# EAGLE board DemoBoard (EAGLE 9.6.2)
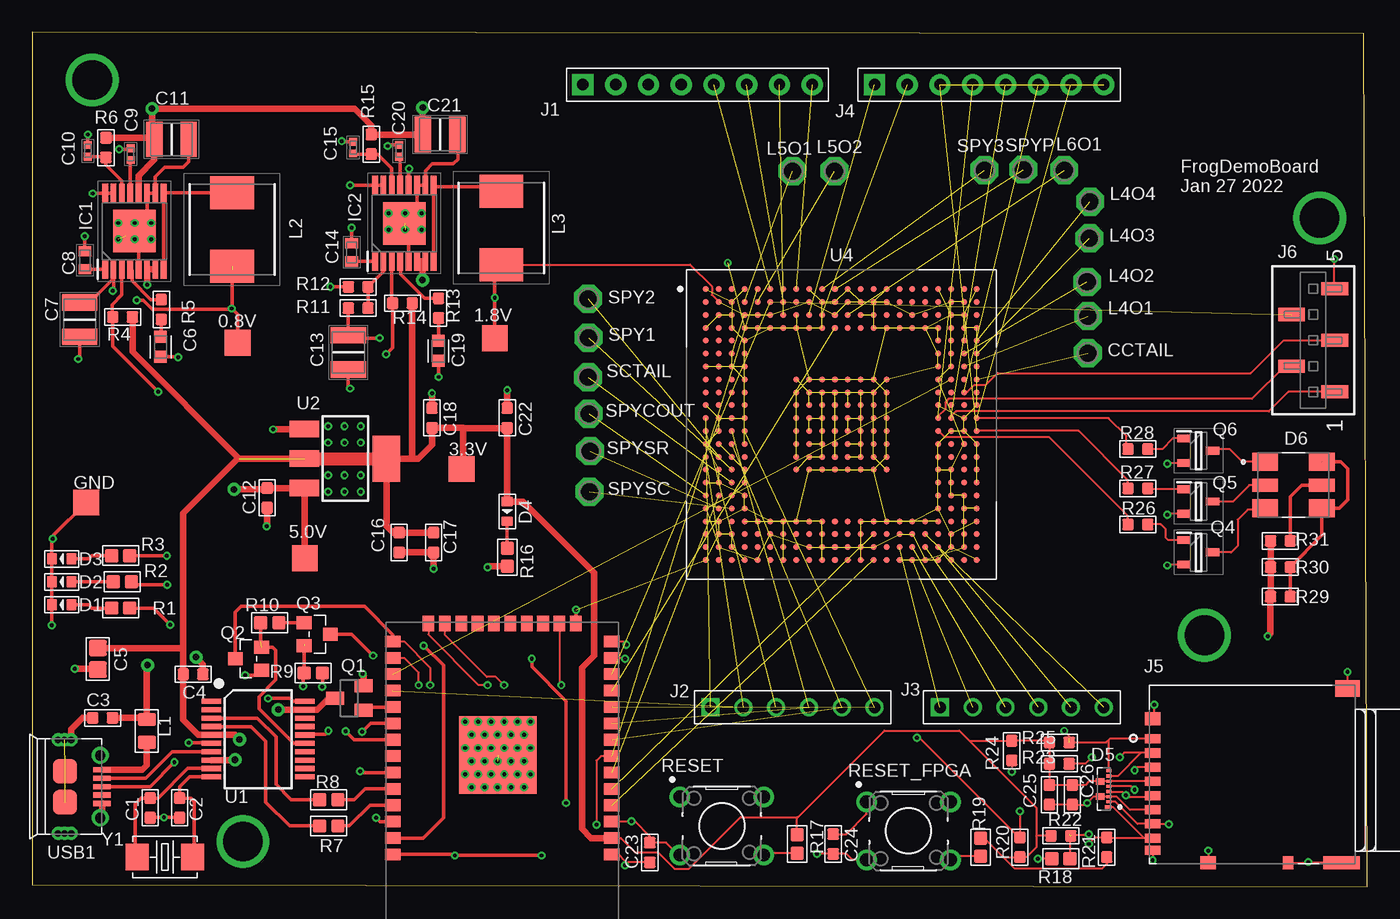
[diagram p0: board, top side]
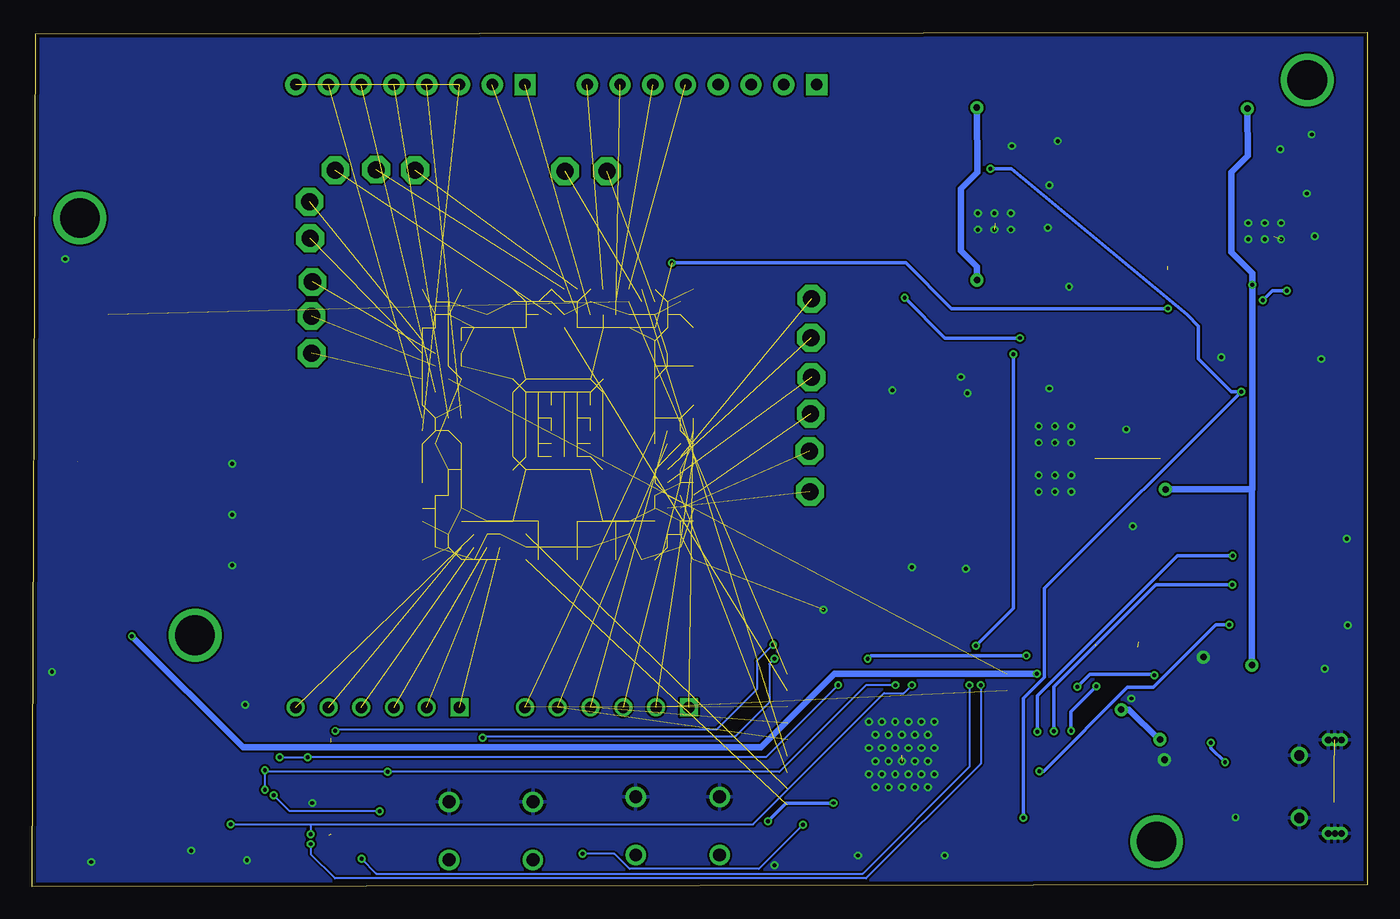
[diagram p1: board, bottom side, seen from below]

Size 103.51 x 66.22 mm. Coordinates in mm from the lower left corner, seen from the top.
Outline: 0,0.13 103.51,0 103.26,66.09 0,66.22 0,0.13
Copper layers (1*16): Top 0.035mm / dielectric 1.5mm / Bottom 0.035mm
Design rules "default *": minimum track width 6mil, minimum drill 12mil, track to track 6mil, track to pad 6mil, pad to pad 6mil, via to via 6mil, smd to smd 0mil, copper to edge 12mil, drill to drill 12mil, minimum pad ring 10mil, minimum via ring 6mil, stop-mask expansion 2mil, vias tented up to drill 0mil, thermal gap 10mil

## Footprints (pad centres in the part's own frame; a part is rotated, then mirrored left to right if it is on the bottom)
TP20SQ = smd 2 x 2: TP 0,0
C0603 = smd 0.889 x 0.889: 1 0,0.762; 2 0,-0.762
C0805 = smd 1.397 x 1.27: 1 0,0.835; 2 0,-0.835
CAPC1608X85 = smd 0.921 x 0.97: 1 -0.775,0; 2 0.775,0
CAPC3225X270N = smd 1.26 x 2.72: 1 -1.33,0; 2 1.33,0
CAPC1608X97N = smd 0.78 x 0.98: 1 -0.7,0; 2 0.7,0
CAPC1005X55N = smd 0.6 x 0.62: 1 -0.46,0; 2 0.46,0
P1-13 = drill 1.321 pad 2.159 octagon: TP 0,0
LED-0603 = smd 0.762 x 0.889: + -0.762,0; - 0.762,0
TVS_ESD7016MUTAG = smd 0.5 x 0.25: 1 -0.35,1.4 | smd 0.4 x 0.25: 2 -0.4,1; 3 -0.4,0.6; 4 -0.4,0.2; 5 -0.4,-0.2; 6 -0.4,-0.6; 7 -0.4,-1; 8 -0.4,-1.4 | smd 0.65 x 0.5: 9 0.275,-0.58; 10 0.275,0.58
LED_IN-P55TATRGB = smd 2 x 1.4: 1 -2.2,1.8; 3 -2.2,-1.8; 4 2.2,-1.8; 6 2.2,1.8 | smd 2 x 1: 2 -2.2,0; 5 2.2,0
SOP65P640X120-17N = smd 1.475 x 0.45: 1 -2.938,2.275; 2 -2.938,1.625; 3 -2.938,0.975; 4 -2.938,0.325; 5 -2.938,-0.325; 6 -2.938,-0.975; 7 -2.938,-1.625; 8 -2.938,-2.275; 9 2.938,-2.275; 10 2.938,-1.625; 11 2.938,-0.975; 12 2.938,-0.325; 13 2.938,0.325; 14 2.938,0.975; 15 2.938,1.625; 16 2.938,2.275 | smd 3.3 x 3.3: 17 0,0
8P-2.54 = drill 0.889 pad 1.651 square: 1 0,8.89 | drill 0.889 pad 1.651: 2 0,6.35; 3 0,3.81; 4 0,1.27; 5 0,-1.27; 6 0,-3.81; 7 0,-6.35; 8 0,-8.89
6P-2.54-55/35MIL = drill 0.889 pad 1.397 square: 1 0,6.35 | drill 0.889 pad 1.397: 2 0,3.81; 3 0,1.27; 4 0,-1.27; 5 0,-3.81; 6 0,-6.35
HRS_DM3AT-SF-PEJM5 = smd 0.7 x 1.2: 1 3.2,0; 2 2.1,0; 3 1,0; 4 -0.1,0; 5 -1.2,0; 6 -2.3,0; 7 -3.4,0; 8 -4.5,0; SWB -5.45,0 | smd 1 x 1.2: P1 -6.4,-4.3; P4 4.75,0 | smd 1 x 2.8: P2 -6.4,-14.65 | smd 1.3 x 1.9: P3 7.1,-15.1 | smd 1 x 0.8: SWA -6.4,-10.5
SAMTEC-MMS-105-02-X-SV = smd 1.016 x 2.085: 1 -4,-1.677; 2 -2,1.677; 3 0,-1.677; 4 2,1.677; 5 4,-1.677
L0805 = smd 1.016 x 1.397: 1 -0.889,0; 2 0.889,0
INDPM7066X300N = smd 2.55 x 3.4: 1 -2.85,0; 2 2.85,0
SOT23 = smd 1 x 1.4: 1 -0.95,-1.1; 2 0.95,-1.1; 3 0,1.1
SOT-23 = smd 1.016 x 1.143: 1 -0.889,-1.016; 2 0.889,-1.016; 3 0,1.016
SOT95P230X110-3N = smd 1.05 x 0.6: 1 -1.1,0.95; 2 -1.1,-0.95; 3 1.1,0
R0603 = smd 1.016 x 1.016: 1 0,0.708; 2 0,-0.708
R0603' = smd 0.889 x 0.889: 1 0,0.762; 2 0,-0.762
SW_B3F-1000 = drill 1 pad 1.6: 1 -3.25,2.25; 2 3.25,2.25; 3 -3.25,-2.25; 4 3.25,-2.25
SSOP20-0.65-7.6X5.2MM = smd 0.4 x 1.5: 1 -2.925,-3.625; 2 -2.275,-3.625; 3 -1.625,-3.625; 4 -0.975,-3.625; 5 -0.325,-3.625; 6 0.325,-3.625; 7 0.975,-3.625; 8 1.625,-3.625; 9 2.275,-3.625; 10 2.925,-3.625; 11 2.925,3.625; 12 2.275,3.625; 13 1.625,3.625; 14 0.975,3.625; 15 0.325,3.625; 16 -0.325,3.625; 17 -0.975,3.625; 18 -1.625,3.625; 19 -2.275,3.625; 20 -2.925,3.625
SOT-223 = smd 1.27 x 2.286: 1 -2.286,-3.175; 2 0,-3.175; 3 2.286,-3.175 | smd 3.556 x 2.159: TER 0,3.175
WROOM32_SKINNY = smd 1.2 x 0.9: 1 -8.5,5; 2 -8.5,3.73; 3 -8.5,2.46; 4 -8.5,1.19; 5 -8.5,-0.08; 6 -8.5,-1.35; 7 -8.5,-2.62; 8 -8.5,-3.89; 9 -8.5,-5.16; 10 -8.5,-6.43; 11 -8.5,-7.7; 12 -8.5,-8.97; 13 -8.5,-10.24; 14 -8.5,-11.51; 25 8.5,-11.51; 26 8.5,-10.24; 27 8.5,-8.97; 28 8.5,-7.7; 29 8.5,-6.43; 30 8.5,-5.16; 31 8.5,-3.89; 32 8.5,-2.62; 33 8.5,-1.35; 34 8.5,-0.08; 35 8.5,1.19; 36 8.5,2.46; 37 8.5,3.73; 38 8.5,5 | smd 0.9 x 1.2: 15 -5.7,-12.9; 16 -4.43,-12.9; 17 -3.16,-12.9; 18 -1.89,-12.9; 19 -0.62,-12.9; 20 0.65,-12.9; 21 1.92,-12.9; 22 3.19,-12.9; 23 4.46,-12.9; 24 5.73,-12.9 | smd 6 x 6: P$1 0.34,-2.7
BGA484C100P22X22_2400X2400X220N = smd 0.45 x 0.45: A1 -10.5,10.5; A2 -9.5,10.5; A3 -8.5,10.5; A4 -7.5,10.5; A5 -6.5,10.5; A6 -5.5,10.5; A7 -4.5,10.5; A8 -3.5,10.5; A9 -2.5,10.5; A10 -1.5,10.5; A11 -0.5,10.5; A12 0.5,10.5; A13 1.5,10.5; A14 2.5,10.5; A15 3.5,10.5; A16 4.5,10.5; A17 5.5,10.5; A18 6.5,10.5; A19 7.5,10.5; A20 8.5,10.5; A21 9.5,10.5; A22 10.5,10.5; AA1 -10.5,-9.5; AA2 -9.5,-9.5; AA3 -8.5,-9.5; AA4 -7.5,-9.5; AA5 -6.5,-9.5; AA6 -5.5,-9.5; AA7 -4.5,-9.5; AA8 -3.5,-9.5; AA9 -2.5,-9.5; AA10 -1.5,-9.5; AA11 -0.5,-9.5; AA12 0.5,-9.5; AA13 1.5,-9.5; AA14 2.5,-9.5; AA15 3.5,-9.5; AA16 4.5,-9.5; AA17 5.5,-9.5; AA18 6.5,-9.5; AA19 7.5,-9.5; AA20 8.5,-9.5; AA21 9.5,-9.5; AA22 10.5,-9.5; AB1 -10.5,-10.5; AB2 -9.5,-10.5; AB3 -8.5,-10.5; AB4 -7.5,-10.5; AB5 -6.5,-10.5; AB6 -5.5,-10.5; AB7 -4.5,-10.5; AB8 -3.5,-10.5; AB9 -2.5,-10.5; AB10 -1.5,-10.5; AB11 -0.5,-10.5; AB12 0.5,-10.5; AB13 1.5,-10.5; AB14 2.5,-10.5; AB15 3.5,-10.5; AB16 4.5,-10.5; AB17 5.5,-10.5; AB18 6.5,-10.5; AB19 7.5,-10.5; AB20 8.5,-10.5; AB21 9.5,-10.5; AB22 10.5,-10.5; B1 -10.5,9.5; B2 -9.5,9.5; B3 -8.5,9.5; B4 -7.5,9.5; B5 -6.5,9.5; B6 -5.5,9.5; B7 -4.5,9.5; B8 -3.5,9.5; B9 -2.5,9.5; B10 -1.5,9.5; B11 -0.5,9.5; B12 0.5,9.5; B13 1.5,9.5; B14 2.5,9.5; B15 3.5,9.5; B16 4.5,9.5; B17 5.5,9.5; B18 6.5,9.5; B19 7.5,9.5; B20 8.5,9.5; B21 9.5,9.5; B22 10.5,9.5; C1 -10.5,8.5; C2 -9.5,8.5; C3 -8.5,8.5; C4 -7.5,8.5; C5 -6.5,8.5; C6 -5.5,8.5; C7 -4.5,8.5; C8 -3.5,8.5; C9 -2.5,8.5; C10 -1.5,8.5; C11 -0.5,8.5; C12 0.5,8.5; C13 1.5,8.5; C14 2.5,8.5; C15 3.5,8.5; C16 4.5,8.5; C17 5.5,8.5; C18 6.5,8.5; C19 7.5,8.5; C20 8.5,8.5; C21 9.5,8.5; C22 10.5,8.5; D1 -10.5,7.5; D2 -9.5,7.5; D3 -8.5,7.5; D4 -7.5,7.5; D5 -6.5,7.5; D6 -5.5,7.5; D7 -4.5,7.5; D8 -3.5,7.5; D9 -2.5,7.5; D10 -1.5,7.5; D11 -0.5,7.5; D12 0.5,7.5; D13 1.5,7.5; D14 2.5,7.5; D15 3.5,7.5; D16 4.5,7.5; D17 5.5,7.5; D18 6.5,7.5; D19 7.5,7.5; D20 8.5,7.5; D21 9.5,7.5; D22 10.5,7.5; E1 -10.5,6.5; E2 -9.5,6.5; E3 -8.5,6.5; E4 -7.5,6.5; E19 7.5,6.5; E20 8.5,6.5; E21 9.5,6.5; E22 10.5,6.5; F1 -10.5,5.5; F2 -9.5,5.5; F3 -8.5,5.5; F4 -7.5,5.5; F19 7.5,5.5; F20 8.5,5.5; F21 9.5,5.5; F22 10.5,5.5; G1 -10.5,4.5; G2 -9.5,4.5; G3 -8.5,4.5; G4 -7.5,4.5; G19 7.5,4.5; G20 8.5,4.5; G21 9.5,4.5; G22 10.5,4.5; H1 -10.5,3.5; H2 -9.5,3.5; H3 -8.5,3.5; H4 -7.5,3.5; H8 -3.5,3.5; H9 -2.5,3.5; H10 -1.5,3.5; H11 -0.5,3.5; H12 0.5,3.5; H13 1.5,3.5; H14 2.5,3.5; H15 3.5,3.5; H19 7.5,3.5; H20 8.5,3.5; H21 9.5,3.5; H22 10.5,3.5; J1 -10.5,2.5; J2 -9.5,2.5; J3 -8.5,2.5; J4 -7.5,2.5; J8 -3.5,2.5; J9 -2.5,2.5; J10 -1.5,2.5; J11 -0.5,2.5; J12 0.5,2.5; J13 1.5,2.5; J14 2.5,2.5; J15 3.5,2.5; J19 7.5,2.5; J20 8.5,2.5; J21 9.5,2.5; J22 10.5,2.5; K1 -10.5,1.5; K2 -9.5,1.5; K3 -8.5,1.5; K4 -7.5,1.5; K8 -3.5,1.5; K9 -2.5,1.5; K10 -1.5,1.5; K11 -0.5,1.5; K12 0.5,1.5; K13 1.5,1.5; K14 2.5,1.5; K15 3.5,1.5; K19 7.5,1.5; K20 8.5,1.5; K21 9.5,1.5; K22 10.5,1.5; L1 -10.5,0.5; L2 -9.5,0.5; L3 -8.5,0.5; L4 -7.5,0.5; L8 -3.5,0.5; L9 -2.5,0.5; L10 -1.5,0.5; L11 -0.5,0.5; L12 0.5,0.5; L13 1.5,0.5; L14 2.5,0.5; L15 3.5,0.5; L19 7.5,0.5; L20 8.5,0.5; L21 9.5,0.5; L22 10.5,0.5; M1 -10.5,-0.5; M2 -9.5,-0.5; M3 -8.5,-0.5; M4 -7.5,-0.5; M8 -3.5,-0.5; M9 -2.5,-0.5; M10 -1.5,-0.5; M11 -0.5,-0.5; M12 0.5,-0.5; M13 1.5,-0.5; M14 2.5,-0.5; M15 3.5,-0.5; M19 7.5,-0.5; M20 8.5,-0.5; M21 9.5,-0.5; M22 10.5,-0.5; N1 -10.5,-1.5; N2 -9.5,-1.5; N3 -8.5,-1.5; N4 -7.5,-1.5; N8 -3.5,-1.5; N9 -2.5,-1.5; N10 -1.5,-1.5; N11 -0.5,-1.5; N12 0.5,-1.5; N13 1.5,-1.5; N14 2.5,-1.5; N15 3.5,-1.5; N19 7.5,-1.5; N20 8.5,-1.5; N21 9.5,-1.5; N22 10.5,-1.5; P1 -10.5,-2.5; P2 -9.5,-2.5; P3 -8.5,-2.5; P4 -7.5,-2.5; P8 -3.5,-2.5; P9 -2.5,-2.5; P10 -1.5,-2.5; P11 -0.5,-2.5; P12 0.5,-2.5; P13 1.5,-2.5; P14 2.5,-2.5; P15 3.5,-2.5; P19 7.5,-2.5; P20 8.5,-2.5; P21 9.5,-2.5; P22 10.5,-2.5; R1 -10.5,-3.5; R2 -9.5,-3.5; R3 -8.5,-3.5; R4 -7.5,-3.5; R8 -3.5,-3.5; R9 -2.5,-3.5; R10 -1.5,-3.5; R11 -0.5,-3.5; R12 0.5,-3.5; R13 1.5,-3.5; R14 2.5,-3.5; R15 3.5,-3.5; R19 7.5,-3.5; R20 8.5,-3.5; R21 9.5,-3.5; R22 10.5,-3.5; T1 -10.5,-4.5; T2 -9.5,-4.5; T3 -8.5,-4.5; T4 -7.5,-4.5; T19 7.5,-4.5; T20 8.5,-4.5; T21 9.5,-4.5; T22 10.5,-4.5; U1 -10.5,-5.5; U2 -9.5,-5.5; U3 -8.5,-5.5; U4 -7.5,-5.5; U19 7.5,-5.5; U20 8.5,-5.5; U21 9.5,-5.5; U22 10.5,-5.5; V1 -10.5,-6.5; V2 -9.5,-6.5; V3 -8.5,-6.5; V4 -7.5,-6.5; V19 7.5,-6.5; V20 8.5,-6.5; V21 9.5,-6.5; V22 10.5,-6.5; W1 -10.5,-7.5; W2 -9.5,-7.5; W3 -8.5,-7.5; W4 -7.5,-7.5; W5 -6.5,-7.5; W6 -5.5,-7.5; W7 -4.5,-7.5; W8 -3.5,-7.5; W9 -2.5,-7.5; W10 -1.5,-7.5; W11 -0.5,-7.5; W12 0.5,-7.5; W13 1.5,-7.5; W14 2.5,-7.5; W15 3.5,-7.5; W16 4.5,-7.5; W17 5.5,-7.5; W18 6.5,-7.5; W19 7.5,-7.5; W20 8.5,-7.5; W21 9.5,-7.5; W22 10.5,-7.5; Y1 -10.5,-8.5; Y2 -9.5,-8.5; Y3 -8.5,-8.5; Y4 -7.5,-8.5; Y5 -6.5,-8.5; Y6 -5.5,-8.5; Y7 -4.5,-8.5; Y8 -3.5,-8.5; Y9 -2.5,-8.5; Y10 -1.5,-8.5; Y11 -0.5,-8.5; Y12 0.5,-8.5; Y13 1.5,-8.5; Y14 2.5,-8.5; Y15 3.5,-8.5; Y16 4.5,-8.5; Y17 5.5,-8.5; Y18 6.5,-8.5; Y19 7.5,-8.5; Y20 8.5,-8.5; Y21 9.5,-8.5; Y22 10.5,-8.5
MICRO-USB5+6P-SMD-0.65-AB = smd 0.4 x 1.35: 1 -1.3,2.875; 2 -0.65,2.875; 3 0,2.875; 4 0.65,2.875; 5 1.3,2.875 | smd 1.9 x 1.9: P1 -1.2,0; P2 1.2,0 | drill 0.508 pad 1.016: P3_1 -3.625,-0.533; P3_2 -3.625,-0.025; P3_3 -3.625,0.483; P4_1 3.625,-0.533; P4_2 3.625,-0.025; P4_3 3.625,0.483 | drill 0.8: P5 -2.425,2.73; P6 2.425,2.73
X2-SMD-5.0X3.2X1.3MM = smd 1.778 x 2.032: 1 -2.159,0; 2 2.159,0

## Placement (x,y rotation side)
0.8V  TPTP20SQ  [TP20SQ]  15.93,42.16 0 top
1.8V  TPTP20SQ  [TP20SQ]  35.86,42.49 0 top
3.3V  TPTP20SQ  [TP20SQ]  33.3,32.36 0 top
5.0V  TPTP20SQ  [TP20SQ]  21.13,25.45 0 top
C1  22pf  [C0603]  9.14,6.1 180 top
C2  22pf  [C0603]  11.43,6.1 180 top
C3  10uf  [C0603]  5.46,13.08 90 top
C4  100nf  [C0603]  12.47,16.46 270 top
C5  22uf  [C0805]  5.08,17.65 0 top
C6  3.3nF  [CAPC1608X85]  9.96,41.83 270 top
C7  100uF  [CAPC3225X270N]  3.68,43.94 270 top
C8  33nF  [CAPC1608X97N]  4.09,48.54 90 top
C9  1uF  [CAPC1005X55N]  7.62,56.77 90 top
C10  100nF  [CAPC1005X55N]  4.32,57.02 90 top
C11  100uF  [CAPC3225X270N]  10.79,57.91 0 top
C12  10uf  [C0603]  18.21,30.12 180 top
C13  100uF  [CAPC3225X270N]  24.51,41.4 270 top
C14  33nF  [CAPC1608X97N]  24.77,49.15 90 top
C15  100nF  [CAPC1005X55N]  24.89,57.28 90 top
C16  10uf  [C0603]  28.45,26.67 180 top
C17  10uf  [C0603]  31.11,26.67 180 top
C18  1uf  [C0603]  30.99,36.32 0 top
C19  3.3nF  [CAPC1608X85]  31.5,41.53 270 top
C20  1uF  [CAPC1005X55N]  28.45,57.02 90 top
C21  100uF  [CAPC3225X270N]  31.62,58.29 0 top
C22  10uf  [C0603]  36.83,36.32 0 top
C23  1uf  [C0603]  47.88,2.64 180 top
C24  1uf  [C0603]  62.1,3.3 0 top
C25  1uf  [C0603]  78.87,7.11 180 top
C26  1uf  [C0603]  80.64,7.11 180 top
CCTAIL  TPPAD1-13  [P1-13]  81.84,41.35 0 top
D1  RED-0603  [LED-0603]  2.29,21.84 180 top
D2  GREEN-0603  [LED-0603]  2.29,23.62 180 top
D3  BLUE-0603  [LED-0603]  2.29,25.4 180 top
D4  YELLOW-0603  [LED-0603]  36.83,29.08 270 top
D5  ESD7016MUTAG  [TVS_ESD7016MUTAG]  83.08,7.57 180 top
D6  IN-P55TATRGB  [LED_IN-P55TATRGB]  97.79,31.11 0 top
GND  TPTP20SQ  [TP20SQ]  4.19,29.77 0 top
IC1  LM20125MHE_NOPB  [SOP65P640X120-17N]  7.92,50.8 90 top
IC2  LM20125MHE_NOPB  [SOP65P640X120-17N]  28.85,51.41 90 top
J1  [8P-2.54]  51.59,62.15 90 top
J2  [6P-2.54-55/35MIL]  58.95,13.89 90 top
J3  [6P-2.54-55/35MIL]  76.73,13.89 90 top
J4  [8P-2.54]  74.19,62.15 90 top
J5  DM3AT-SF-PEJM5  [HRS_DM3AT-SF-PEJM5]  86.87,8.26 90 top
J6  SAMTEC-MMS-105-02-X-SVJ  [SAMTEC-MMS-105-02-X-SV]  99.31,42.34 90 top
L1  330R-1500MA  [L0805]  8.89,12.07 90 top
L2  1.5uH  [INDPM7066X300N]  15.49,50.93 90 top
L3  1.5uH  [INDPM7066X300N]  36.37,51.05 90 top
L4O1  TPPAD1-13  [P1-13]  81.86,44.22 0 top
L4O2  TPPAD1-13  [P1-13]  81.79,46.86 0 top
L4O3  TPPAD1-13  [P1-13]  81.97,50.24 0 top
L4O4  TPPAD1-13  [P1-13]  82.02,53.09 0 top
L5O1  TPPAD1-13  [P1-13]  58.95,55.45 0 top
L5O2  TPPAD1-13  [P1-13]  62.2,55.45 0 top
L6O1  TPPAD1-13  [P1-13]  80.01,55.52 0 top
Q1  IRLML0030TRPBF  [SOT23]  24.59,14.61 90 top
Q2  MMBT3904,215  [SOT-23]  16.76,17.65 90 top
Q3  MMBT3904,215  [SOT-23]  22.1,19.56 270 top
Q4  BC846B,235  [SOT95P230X110-3N]  90.42,25.91 0 top
Q5  BC846B,235  [SOT95P230X110-3N]  90.42,29.84 0 top
Q6  BC846B,235  [SOT95P230X110-3N]  90.42,33.78 0 top
R1  220R  [R0603]  6.86,21.59 90 top
R2  100R  [R0603]  6.99,23.62 90 top
R3  100R  [R0603]  6.86,25.65 90 top
R4  10k  [R0603']  7.01,44.15 270 top
R5  3.16k  [R0603']  10.01,44.73 0 top
R6  1  [R0603']  5.71,57.28 0 top
R7  220R  [R0603]  22.99,4.7 90 top
R8  220R  [R0603]  22.99,6.73 270 top
R9  10K  [R0603]  21.79,16.56 90 top
R10  10K  [R0603]  18.41,20.45 90 top
R11  12.7k  [R0603']  25.27,44.83 90 top
R12  10.2k  [R0603']  25.27,46.48 270 top
R13  3.16k  [R0603']  31.5,44.83 0 top
R14  10k  [R0603']  28.7,45.21 270 top
R15  1  [R0603']  26.29,57.53 0 top
R16  220R  [R0603]  36.83,25.53 180 top
R17  10K  [R0603]  59.31,3.3 180 top
R18  0R  [R0603]  79.76,2.16 90 top
R19  10K  [R0603]  73.53,3.05 180 top
R20  51K  [R0603']  76.58,3.05 0 top
R21  51K  [R0603']  83.31,3.05 0 top
R22  51K  [R0603']  79.76,3.94 270 top
R23  51K  [R0603']  79.63,9.53 270 top
R24  4.7K  [R0603']  75.95,10.54 180 top
R25  51K  [R0603']  79.63,11.18 270 top
R26  16k  [R0603']  85.72,28.07 90 top
R27  16k  [R0603']  85.72,30.86 90 top
R28  16k  [R0603']  85.72,33.91 270 top
R29  5.1  [R0603']  96.77,22.48 90 top
R30  5.1  [R0603']  96.77,24.77 90 top
R31  68  [R0603']  96.77,26.8 90 top
RESET  B3F-1000  [SW_B3F-1000]  53.47,4.7 0 top
RESET_FPGA  B3F-1000  [SW_B3F-1000]  67.94,4.32 0 top
SCTAIL  TPPAD1-13  [P1-13]  43.1,39.47 0 top
SPY1  TPPAD1-13  [P1-13]  43.13,42.55 0 top
SPY2  TPPAD1-13  [P1-13]  43.1,45.57 0 top
SPY3  TPPAD1-13  [P1-13]  73.84,55.52 0 top
SPYCOUT  TPPAD1-13  [P1-13]  43.15,36.65 0 top
SPYP  TPPAD1-13  [P1-13]  76.83,55.58 0 top
SPYSC  TPPAD1-13  [P1-13]  43.21,30.61 0 top
SPYSR  TPPAD1-13  [P1-13]  43.26,33.76 0 top
U1  CH340T-SSOP20  [SSOP20-0.65-7.6X5.2MM]  17.53,11.43 270 top
U2  PMIC-CJT1117-3.3(SOT223)  [SOT-223]  24.28,33.17 270 top
U3  ESP32_WROOM32_SKINNY  [WROOM32_SKINNY]  36.45,7.49 180 top
U4  FROG12NM  [BGA484C100P22X22_2400X2400X220N]  62.74,35.81 0 top
USB1  ZX62-B-5PA  [MICRO-USB5+6P-SMD-0.65-AB]  2.54,7.75 270 top
Y1  12MHZ - 445I33E12M00000  [X2-SMD-5.0X3.2X1.3MM]  10.29,2.29 180 top

## Library data of the parts
0.8V 1.8V 3.3V 5.0V CCTAIL GND L4O1-L4O4 L5O1 L5O2 L6O1 SCTAIL SPY1-SPY3 SPYCOUT SPYP SPYSC SPYSR = testpad
C1 C2 = Seeed-Capacitor; MPN: CC0603JRNPO9BN220
C3 C12 C16 C17 C22 = Seeed-Capacitor; MPN: CC0603KRX5R6BB106
C4 = Seeed-Capacitor; MPN: CC0603KRX7R9BB104
C5 = Seeed-Capacitor; MPN: CC0805MKX5R5BB226
C6 C19 = Capacitor; CATEGORY: Capacitor
C7 C11 C13 C21 = GRM32ER60J107ME20L; DESCRIPTION: 1210 X5R ceramic cap,100uF 6.3V Murata 1210 GRM 100uF Ceramic Multilayer Capacitor, 6.3 V dc, +85C, X5R Dielectric, +/-20% SMD; HEIGHT: 2.7mm; MANUFACTURER_NAME: Murata Electronics; MANUFACTURER_PART_NUMBER: GRM32ER60J107ME20L; MOUSER_PART_NUMBER: 81-GRM32ER60J107ME20; MOUSER_PRICE-STOCK: https://www.mouser.co.uk/ProductDetail/Murata-Electronics/GRM32ER60J107ME20L?qs=35X%252B5ekJ2E6CDZFQeV9O8Q%3D%3D
C8 C14 = VJ0603Y333KXXAC; DESCRIPTION: Vishay VJ0603Y333KXXAC 33nF MLCC 25V dc +/-10% Tolerance SMD; HEIGHT: 0.97mm; MANUFACTURER_NAME: Vishay; MANUFACTURER_PART_NUMBER: VJ0603Y333KXXAC; MOUSER_PART_NUMBER: 77-VJ0603Y333KXXAC; MOUSER_PRICE-STOCK: https://www.mouser.co.uk/ProductDetail/Vishay-Vitramon/VJ0603Y333KXXAC?qs=oNxrVNw6PNVD7uvknxabUQ%3D%3D
C9 C20 = GRM155R61E105KA12D; DESCRIPTION: MURATA - GRM155R61E105KA12D - CAP, MLCC, X5R, 1UF, 25V, 0402; HEIGHT: 0.55mm; MANUFACTURER_NAME: Murata Electronics; MANUFACTURER_PART_NUMBER: GRM155R61E105KA12D; MOUSER_PART_NUMBER: 81-GRM155R61E105KA2D; MOUSER_PRICE-STOCK: https://www.mouser.co.uk/ProductDetail/Murata-Electronics/GRM155R61E105KA12D?qs=hiffU4J9V6bE4a81t2Mv5A%3D%3D
C10 C15 = GCM155R71C104KA55D; DESCRIPTION: Capacitor GCM15 L=1.0mm W=0.5mm T=0.5mm; HEIGHT: 0.55mm; MANUFACTURER_NAME: Murata Electronics; MANUFACTURER_PART_NUMBER: GCM155R71C104KA55D; MOUSER_PART_NUMBER: 81-GCM155R71C104KA5D; MOUSER_PRICE-STOCK: https://www.mouser.co.uk/ProductDetail/Murata-Electronics/GCM155R71C104KA55D?qs=aEuGZpxfbxVTPYRtXT4ecg%3D%3D
C18 C23-C26 = Seeed-Capacitor; MPN: CC0603KRX7R8BB105
D1 = Seeed-LED; MPN: 19-217-R6C-AL1M2VY-3T
D2 = Seeed-LED; MPN: 19-217-G7C-AN1P2-3T
D3 = Seeed-LED; MPN: 19-217-BHC-ZL1M2RY-3T
D4 = Seeed-LED; MPN: 19-217-Y5C-AM1N1VY-3T
D5 = ESD7016MUTAG; AVAILABILITY: In Stock; DESCRIPTION: 10V Clamp 1A (8/20µs) Ipp Tvs Diode Surface Mount 8-UDFN (3.3x1.0); MF: ON Semiconductor; MP: ESD7016MUTAG; PACKAGE: UDFN-8 ON Semiconductor; PRICE: None; PURCHASE-URL: https://pricing.snapeda.com/search/part/ESD7016MUTAG/?ref=eda
D6 = IN-P55TATRGB; AVAILABILITY: Warning; DESCRIPTION: Red, Green, Blue (RGB) 624nm Red, 520nm Green, 468nm Blue LED Indication - Discrete 2V Red, 3.2V Green, 3.2V Blue 6-SMD, J-Lead; MF: Inolux; MOUSER-PURCHASE-URL: https://snapeda.com/shop?store=Mouser&id=3600412; MP: IN-P55TATRGB; PACKAGE: SMD-6 Inolux; PRICE: None
IC1 IC2 = LM20125MHE_NOPB; DESCRIPTION: 2.95-5.5V, 5A, Current Mode Synchronous Buck Regulator with Optional Automotive Grade; HEIGHT: 1.2mm; MANUFACTURER_NAME: Texas Instruments; MANUFACTURER_PART_NUMBER: LM20125MHE/NOPB; MOUSER_PART_NUMBER: 926-LM20125MHE/NOPB; MOUSER_PRICE-STOCK: https://www.mouser.co.uk/ProductDetail/Texas-Instruments/LM20125MHE-NOPB?qs=X1J7HmVL2ZErox0lMoKn2A%3D%3D
J1-J4 = connector
J5 = DM3AT-SF-PEJM5; AVAILABILITY: Good; DESCRIPTION: Memory Card Connectors R/A SMT MICROSD CON PUSH-PUSH TOP BRDMNT; MF: Hirose Connector; MP: DM3AT-SF-PEJM5; PACKAGE: None; PRICE: None; PURCHASE-URL: https://pricing.snapeda.com/search/part/DM3AT-SF-PEJM5/?ref=eda
J6 = connector5pin; AVAILABILITY: Bad; DESCRIPTION: 5 Position Receptacle Connector Surface Mount; MF: Samtec; MP: MMS-105-02-L-SV-K; PACKAGE: None; PRICE: None
L1 = Seeed-Inductor; MPN: BLM21PG331SN1D
L2 L3 = FDSD0630-H-1R0MB=P3; DESCRIPTION: Fixed Inductors 2726 30VDC 1uH 20% 13400mA; HEIGHT: 3mm; MANUFACTURER_NAME: Murata Electronics; MANUFACTURER_PART_NUMBER: FDSD0630-H-1R0MB=P3; MOUSER_PART_NUMBER: 81-FDSD0630H1R0MB=P3; MOUSER_PRICE-STOCK: https://www.mouser.co.uk/ProductDetail/Murata-Electronics/FDSD0630-H-1R0MB%3dP3?qs=OlC7AqGiEDkXEYHel%252BUfZw%3D%3D
Q1 = IRLML0030TRPBF
Q2 Q3 = Seeed-Transistor; MPN: MMBT3904LT1G
Q4-Q6 = BC846B_235; DESCRIPTION: BC846 series - 65 V, 100 mA NPN general-purpose transistors; HEIGHT: 1.1mm; MANUFACTURER_NAME: Nexperia; MANUFACTURER_PART_NUMBER: BC846B,235; MOUSER_PART_NUMBER: 771-BC846B235; MOUSER_PRICE-STOCK: https://www.mouser.co.uk/ProductDetail/Nexperia/BC846B235?qs=me8TqzrmIYV6j%2F8Z1FkTHw%3D%3D
R1 R7 R8 R16 = Seeed-Resistor; MPN: RC0603JR-07220RL
R2 = Seeed-Resistor; MPN: RC0603JR-0710RL
R3 = Seeed-Resistor; MPN: RC0603JR-07100RL
R4-R6 R11-R15 R24 R26-R31 = Seeed-Resistor-2016; MPN: RC0603JR-074K7L
R9 R10 R17 R19 = Seeed-Resistor; MPN: RC0603FR-0710KL
R18 = Seeed-Resistor; MPN: RC0603JR-070RL
R20-R23 R25 = Seeed-Resistor-2016; MPN: RC0603JR-0751KL
RESET RESET_FPGA = B3F-1000; AVAILABILITY: Good; DESCRIPTION: Tactile Switch SPST-NO Top Actuated Through Hole; MF: Omron; MP: B3F-1000; PACKAGE: None; PRICE: None; PURCHASE-URL: https://pricing.snapeda.com/search/part/B3F-1000/?ref=eda
U1 = Seeed-IC; MPN: CH340T
U2 = Seeed-IC; MPN: LD1117S33CTR
U3 = microbuilder
U4 = BGASolder
USB1 = Seeed-Connector; MPN: ZX62-B-5PA
Y1 = Seeed-Crystal Oscillator; MPN: 5032/2P

## Nets
0.8V: 0.8V.TP C7.1 IC1.2 L2.1 U4.C8 U4.D4 U4.D5 U4.D7 U4.D8 U4.D15 U4.D16 U4.D19 U4.E19 U4.H9 U4.H10 U4.H11 U4.H12 U4.H13 U4.H14 U4.J8 U4.J15 U4.K8 U4.K15 U4.L8 U4.L15 U4.M8 U4.M15 U4.N8 U4.N15 U4.P8 U4.P15 U4.R9 U4.R10 U4.R11 U4.R12 U4.R13 U4.R14 U4.W4 U4.W5 U4.W8 U4.W15 U4.W18 U4.W19
1.8V: 1.8V.TP C13.1 L3.1 R11.1 U4.AA2 U4.AA9 U4.AA14 U4.AA21 U4.AB5 U4.AB18 U4.B2 U4.B9 U4.B12 U4.B15 U4.B20 U4.B21 U4.C4 U4.C6 U4.C11 U4.C17 U4.D20 U4.E20 U4.F3 U4.F20 U4.G3 U4.G20 U4.H4 U4.H19 U4.N2 U4.N21 U4.R4 U4.R19 U4.R20 U4.T4 U4.U3 U4.U20 U4.U21 U4.V1 U4.V21 U4.V22 U4.Y6 U4.Y16 U4.Y17
3.3V: 3.3V.TP C4.2 C5.1 C16.2 C17.2 C18.2 C22.2 C25.2 C26.2 D4.+ D5.6 D5.9 J5.4 Q1.3 R4.1 R14.1 R17.2 R19.2 R20.2 R21.2 R22.2 R23.2 R24.2 R25.2 U1.5 U1.19 U2.2 U2.TER U3.2
3.3VSW: Q1.2 R29.1 R30.1 R31.1
3V3_EN: Q1.1 U3.29
5.0V: 5.0V.TP C3.2 C11.1 C12.2 C21.1 IC1.6 IC1.7 IC1.12 IC2.6 IC2.7 L1.2 R6.1 R15.1 U2.3
CCFF_HEAD: U3.6 U4.U2
CLK: J6.4 U3.12 U4.B6
DTR: Q2.2 R10.1 U1.15
GND: C1.1 C2.1 C3.1 C4.1 C5.2 C6.2 C7.2 C8.2 C9.2 C10.2 C11.2 C12.1 C13.2 C14.2 C15.2 C16.1 C17.1 C18.1 C19.2 C20.2 C21.2 C22.1 C23.1 C24.1 C25.1 C26.1 D1.- D2.- D3.- D5.3 D5.10 GND.TP IC1.5 IC1.10 IC1.11 IC1.15 IC1.16 IC1.17 IC2.5 IC2.10 IC2.11 IC2.15 IC2.16 IC2.17 J5.6 J5.P1 J5.P2 J5.P3 J5.P4 J5.SWA J5.SWB J6.5 Q4.2 Q5.2 Q6.2 R12.2 R16.1 RESET.1 RESET.2 RESET_FPGA.1 RESET_FPGA.2 U1.8 U1.20 U2.1 U3.1 U3.15 U3.38 U3.P$1 U4.A1 U4.A4 U4.A9 U4.A12 U4.A15 U4.A19 U4.A22 U4.AA3 U4.AA10 U4.AA13 U4.AA20 U4.AB1 U4.AB4 U4.AB7 U4.AB10 U4.AB13 U4.AB16 U4.AB19 U4.AB22 U4.B3 U4.B10 U4.B11 U4.B13 U4.B14 U4.C2 U4.C3 U4.C13 U4.C14 U4.C20 U4.C21 U4.D1 U4.D3 U4.D6 U4.D9 U4.D10 U4.D14 U4.D17 U4.D18 U4.D21 U4.D22 U4.E4 U4.F4 U4.F19 U4.G1 U4.G4 U4.G19 U4.G22 U4.H8 U4.H15 U4.J4 U4.J9 U4.J10 U4.J11 U4.J12 U4.J13 U4.J14 U4.K1 U4.K4 U4.K9 U4.K10 U4.K11 U4.K12 U4.K13 U4.K14 U4.K19 U4.K22 U4.L2 U4.L4 U4.L9 U4.L10 U4.L11 U4.L12 U4.L13 U4.L14 U4.L21 U4.M2 U4.M9 U4.M10 U4.M11 U4.M12 U4.M13 U4.M14 U4.M20 U4.M21 U4.N1 U4.N4 U4.N9 U4.N10 U4.N11 U4.N12 U4.N13 U4.N14 U4.N19 U4.N22 U4.P9 U4.P10 U4.P11 U4.P12 U4.P13 U4.P14 U4.R2 U4.R8 U4.R15 U4.T1 U4.T2 U4.T19 U4.T22 U4.U4 U4.U19 U4.V4 U4.V19 U4.W1 U4.W2 U4.W6 U4.W7 U4.W10 U4.W13 U4.W16 U4.W17 U4.W22 U4.Y2 U4.Y3 U4.Y10 U4.Y13 U4.Y20 USB1.5 USB1.P1 USB1.P2 USB1.P3_1 USB1.P3_2 USB1.P3_3 USB1.P4_1 USB1.P4_2 USB1.P4_3 USB1.P5 USB1.P6
GPIO0: J1.8 U4.A8
GPIO0_ESP: Q2.3 R18.1 U3.25
GPIO1: J4.2 U4.C10
GPIO2: J4.1 U4.C9
GPIO3: J1.5 U4.A6
GPIO4: J1.6 U4.B7
GPIO5: J1.7 U4.C7
GPIO6: J2.5 U3.8 U4.N3
GPIO7: J2.2 U3.28 U4.P1
GPIO8: J2.4 U3.9 U4.M3
GPIO9: J2.6 U3.10 U4.M4
GPIO10: J2.3 U4.M1
GPIO11: J2.1 U4.L1
GPIO12: J3.6 U4.Y18
GPIO13: J3.5 U4.AA19
GPIO14: J3.4 U4.AA18
GPIO15: J3.3 U4.AA17
GPIO16: J3.1 U4.AA16
GPIO17: J3.2 U4.AB17
GPIO18: R26.1 U4.M19
GPIO19: J4.3 J4.8 R27.1 U4.M22
GPIO20: J4.7 R28.2 U4.L22
GPIO21: J4.4 J6.2 U4.L19
GPIO22: J4.5 J6.1 U4.L20
GPIO23: J4.6 J6.3 U4.J21
N$1: D2.+ R2.1
N$2: R17.1 RESET.4
N$3: R19.1 RESET_FPGA.4
N$4: L4O4.TP U4.E22
N$5: L4O2.TP U4.F21
N$6: L4O3.TP U4.F22
N$7: D1.+ R1.1
N$8: L4O1.TP U4.G21
N$9: L5O1.TP U4.B4
N$10: L5O2.TP U4.B5
N$11: L6O1.TP U4.C12
N$12: Q3.1 R10.2
N$13: Q2.1 R9.2
N$14: IC1.4 R5.1
N$15: SPY2.TP U4.P2
N$16: SPY3.TP U4.A10
N$17: C6.1 R5.2
N$18: SPY1.TP U4.R3
N$19: SPYCOUT.TP U4.U1
N$20: C9.1 IC1.13
N$21: SPYSC.TP U4.V3
N$22: D3.+ R3.1
N$23: SPYSR.TP U4.V2
N$24: SPYP.TP U4.A11
N$25: D4.- R16.2
N$26: U1.7 USB1.2
N$27: U1.6 USB1.3
N$28: C1.2 U1.9 Y1.2
N$29: C2.2 U1.10 Y1.1
N$30: R8.2 U1.3
N$31: D6.1 Q6.3
N$32: Q5.1 R27.2
N$33: R7.2 U3.35
N$34: C8.1 IC1.1
N$35: IC1.8 IC1.9 L2.2
N$36: CCTAIL.TP U4.H22
N$37: C10.1 IC1.14 R6.2
N$38: IC2.4 R13.1
N$39: C19.1 R13.2
N$40: C20.1 IC2.13
N$41: C14.1 IC2.1
N$42: IC2.8 IC2.9 L3.2
N$43: C15.1 IC2.14 R15.2
N$44: D6.2 Q5.3
N$45: D6.3 Q4.3
N$47: Q6.1 R28.1
N$48: U3.17
N$49: Q4.1 R26.2
N$50: U3.18
N$51: U3.19
N$52: U3.20
N$53: U3.21
N$54: U3.22
N$55: J1.4
N$56: J1.3
N$57: D6.5 R31.2
N$58: J1.2
N$59: J1.1
N$61: SCTAIL.TP U4.T3
N$64: U1.14
N$65: U1.13
N$66: U1.12
N$67: U1.11
N$68: U1.18
N$69: U1.1
N$70: U1.2
P_RESET: U3.5 U4.Y14
PG_CORE: IC1.3 IC2.12 R4.2 U3.36
PG_IO: IC2.3 R14.2 U3.37
PROG_CLK: U3.4 U4.AB14
RESET: C23.2 Q3.3 RESET.3 U3.3
RESET_FPGA: C24.2 RESET_FPGA.3 U3.7 U4.A5
RTS: Q3.2 R9.1 U1.16
RXD0: R8.1 U3.34
SC_HEAD: U3.27 U4.H20
SD_CLK_IO14: D5.4 J5.5 R20.1 U3.13
SD_CMD_IO15: D5.5 J5.3 R24.1 U3.23
SD_CS_IO13: D5.7 J5.2 R23.1 U3.16
SD_D0_IO2: D5.2 J5.7 R18.2 R22.1 U3.24
SD_D1_IO4: D5.1 J5.8 R21.1 U3.26
SD_D2_IO12: D5.8 J5.1 R25.1 U3.14
STAT_LED1: R1.2 U3.33
STAT_LED2: R2.2 U3.31
STAT_LED3: R3.2 U3.30
TEST_EN: U3.11 U4.D11
TXD0: R7.1 U1.4
VBUS: L1.1 USB1.1
VCC2: D6.4 D6.6 R29.2 R30.2
VDD_CORE: IC2.2 R11.2 R12.1

## Tracks (layer width: path | path; a pad name or v marks a point on that pad's centre or on a via)
0.8V  (via drill 0.3)  (40 unrouted)
  Top 0.254: C7.1 4.42,45.27 6.31,47.16 IC1.2 6.3,46.23 v6.25,46.18 | v8.1,45.44 8.62,45.44 9.29,44.77 15.38,44.77 15.49,44.88 | 15.49,44.88 15.49,44.91 15.49,47.82 | 15.49,44.88 15.49,44.78 v15.47,44.81 15.93,44.35 0.8V.TP
  Bottom 0.254: v6.25,46.18 7.37,46.18 v8.1,45.44 | v15.47,44.81 32.23,44.81 35.76,48.34 v53.92,48.34
1.8V  (via drill 0.3)  (38 unrouted)
  Top 0.152: U4.B2 52.69,45.86 52.69,46.53 51.02,48.2 L3.1
  Top 0.254: R11.1 C13.1 24.72,42.52 v26.92,42.52 | L3.1 35.87,47.7 v35.87,45.64 1.8V.TP
  Bottom 0.254: v26.92,42.52 32.74,42.52 v35.87,45.64
3.3V  (via drill 0.51 pad 1.02)  (1 unrouted)
  Top 0.152: R17.2 59.31,5.39 | 59.31,5.39 54.92,5.39 50.88,1.35 49.83,1.35 48.51,2.67 46.74,2.67 45.64,3.76 U3.2 | 59.31,5.39 59.36,5.39 66.06,12.09 71.88,12.09 72.67,11.3 | 72.67,11.3 R24.2 78.74,11.3 R25.2 R23.2 C25.2 C26.2 81.64,7.87 81.92,8.15 D5.9 83.46,8.15 D5.6 83.5,8.16 J5.4 | R19.2 73.69,3.91 75.31,2.29 | 75.31,2.29 R20.2 77.09,2.29 77.85,3.05 77.85,3.94 | R21.2 83.31,1.78 82.93,1.4 76.2,1.4 75.31,2.29 | R22.2 77.85,3.94 | 72.67,11.3 77.85,6.12 77.85,3.94
  Top 0.508: 29.44,33.17 U2.TER 27.46,27.94 27.96,27.43 C16.2 C17.2 | 29.44,33.17 29.92,33.17 30.99,34.24 C18.2 33.4,35.56 33.4,35.51 | 33.4,35.51 36.78,35.51 C22.2 D4.+ 38.05,29.84 43.56,24.33 43.56,17.91 42.62,16.97 42.62,4.47 43.33,3.76 U3.2 | U2.2 16.05,33.17 7.77,41.45 R4.1 | 15.93,33.17 11.68,28.93 11.68,20.8 11.71,20.78 11.71,18.41 | 11.71,18.41 C4.2 11.71,12.92 12.86,11.77 13.88,11.77 U1.5 15.73,11.76 v16.08,11.41 | R14.1 29.44,45.19 29.44,33.17 | v19.07,13.72 U1.19 22.08,13.71 22.98,14.61 Q1.3 | 33.4,35.51 33.4,32.46 3.3V.TP | 11.71,18.41 11.64,18.49 C5.1
  Top 1.016: U2.2 U2.TER
  Bottom 0.508: v16.08,11.41 16.15,11.41 18.47,13.72 v19.07,13.72
3.3VSW  (via drill 0.3)
  Top 0.508: v25.63,16.48 25.69,16.43 Q1.2 | v95.78,19.41 95.99,19.61 95.99,22.45 R29.1 R30.1 R31.1
  Bottom 0.508: v25.63,16.48 41.3,16.48 46.99,10.79 87.17,10.79 v95.78,19.41
3V3_EN
  Top 0.254: U3.29 27.93,13.91 25.94,13.91 Q1.1
5.0V  (via drill 0.3, 0.51 pad 1.02)
  Top 0.508: C3.2 8.64,13.08 8.76,12.95 L1.2 8.89,17.17 v8.94,17.17 | IC1.7 IC1.6 8.91,47.86 v8.91,46.63 | IC2.6 IC2.7 30.25,48.24 v30.25,47.02 | IC1.12 8.25,55.11 9.46,56.33 C11.1 | R6.1 9.37,58.04 9.46,57.95 C11.1 | v30.28,60.38 30.28,58.31 C21.1 30.25,58.29 30.23,58.32 30.2,58.29 R15.1 26.29,59 24.99,60.3 v9.3,60.3 9.3,58.08 C11.1 | v15.65,30.79 18.11,30.79 C12.2 U2.3 21.11,25.48 5.0V.TP
  Bottom 0.508: v30.25,47.02 30.25,48.03 31.5,49.28 31.5,54.1 30.23,55.37 30.25,60.35 v30.28,60.38 | v8.94,17.17 8.94,30.79 | v9.3,60.3 9.27,56.65 10.54,55.37 10.54,49.15 8.91,47.52 v8.91,46.63 8.91,30.79 8.94,30.79 | 8.94,30.79 v15.65,30.79
CCFF_HEAD  (1 unrouted)
CLK  (2 unrouted)
DTR  (1 unrouted)
  Top 0.254: Q2.2 18.64,18.54 18.87,18.31 18.87,16.02 17.58,14.73 17.58,13.79 20.26,11.11 U1.15 | R10.1 17.71,19
GND  (via drill 0.3, 0.51 pad 1.02)  (130 unrouted)
  Top 0.152: C25.1 C26.1 81.66,6.35 v81.79,6.48 | v81.79,6.48 82.3,6.99 D5.10 83.46,6.99 D5.3 84.09,6.97 85.1,5.96 J5.6 | v81.79,6.48 | J5.SWB v86.87,2.03 | v91.19,2.79 91.17,2.78 J5.P1 | J5.SWA 98.88,1.85 v98.93,1.91 98.98,1.85 J5.P2 | v101.98,16.64 101.97,16.62 J5.P3 | J5.P4 87,13.13 v87,14.1 | C23.1 47.85,1.91 46.23,1.91 v45.97,1.65 45.97,1.98 45.46,2.49 U3.1 | C24.1 63.12,4.06 64.69,5.64 RESET_FPGA.1 | Q4.2 88.08,24.96 v88.01,24.89 | Q5.2 88.08,28.89 v88.01,28.83 | Q6.2 88.08,32.83 v88.01,32.77 | J6.5 100.97,46.37 v100.97,48.64
  Top 0.254: C1.1 9.17,5.36 v10.21,5.36 11.4,5.36 C2.1 | v15.72,9.83 15.7,9.81 | U1.20 20.24,14.36 20.02,14.58 v18.29,14.58 | v1.52,20.27 D1.- D2.- D3.- 1.52,26.87 v1.6,26.95 1.6,27.18 GND.TP | IC1.15 IC1.16 4.72,53.74 v4.7,53.72 | C9.2 7.54,57.15 v6.73,57.15 | C8.2 4.06,49.27 v4.06,50.42 | IC1.17 7.54,50.42 7.24,50.42 | C10.2 v4.32,58.29 | 12.12,57.32 C11.2 12.12,56.19 11.68,55.75 10.29,55.75 9.55,55.02 IC1.10 IC1.11 8.9,51.76 v9.22,51.44 | IC2.15 IC2.16 v24.65,54.35 v24.64,54.36 | C7.2 3.68,41.02 v3.56,40.89 | C6.2 11.27,41.06 v11.3,41.02 | C19.2 v31.5,39.5 | C13.2 24.51,38.73 v24.64,38.61 | C14.2 v24.77,51.05 | C20.2 27.64,57.48 v27.56,57.4 | v24,57.79 24.05,57.74 C15.2 | IC2.5 29.18,51.09 IC2.17 29.83,52.39 IC2.11 IC2.10 30.48,55.5 30.99,56.01 32.64,56.01 33.02,56.39 33.02,58.23 C21.2 | R12.2 v23.11,46.48 | U3.15 42.15,21.45 v42.16,21.46 | IC1.5 8.25,49.87 v7.95,50.16 | U3.38 32.69,2.49 v32.77,2.41 v39.5,2.41
  Top 0.508: C3.1 3.92,13.08 3.02,12.19 USB1.P3_3 | USB1.5 5.42,5.47 USB1.P6 | 15.7,9.81 U1.8 | U2.1 18.69,35.46 v18.67,35.43 | C18.1 v30.99,38.23 | C22.1 v36.83,38.48 | R16.1 35.36,24.82 v35.31,24.77 | v31.11,24.64 C17.1 C16.1 | C12.1 18.21,27.99 v18.16,27.94 | C5.2 5.01,16.89 v3.3,16.89 | v12.7,17.78 13.23,17.25 C4.1
  other vias: 25.48,31.88 25.48,30.61 24.21,30.61 24.21,31.88 22.94,31.88 22.94,30.61 22.94,34.42 24.21,34.42 25.48,34.42 25.48,35.69 24.21,35.69 22.94,35.69 36.6,12.78 35.59,12.78 34.57,12.78 33.55,12.78 38.63,12.78 37.62,12.78 38.13,11.76 37.11,11.76 36.09,11.76 35.08,11.76 34.06,11.76 33.55,10.74 34.57,10.74 35.59,10.74 36.6,10.74 37.62,10.74 38.63,10.74 38.13,9.73 37.11,9.73 36.09,9.73 35.08,9.73 34.06,9.73 33.55,8.71 34.57,8.71 35.59,8.71 36.6,8.71 37.62,8.71 38.63,8.71 38.13,7.7 37.11,7.7 36.09,7.7 35.08,7.7 34.06,7.7 6.68,50.16 9.22,50.16 7.95,51.44 6.68,51.44 27.64,50.93 28.91,50.93 30.18,50.93 30.18,52.2 28.91,52.2 27.64,52.2
  pour Bottom: -2.41,66.8 -2.41,-2.41 -2.29,-2.54 106.4,-2.54 106.78,-2.92 106.78,66.8 106.91,66.93 -2.31,66.93 -2.41,66.83
GPIO0  (1 unrouted)
GPIO0_ESP  (via drill 0.3)
  Top 0.152: U3.25 28.81,19 30.86,16.96 v30.86,15.62 | R18.1 v77.98,2.16
  Top 0.254: Q2.3 15.75,21.26 16.2,21.72 25.76,21.72 27.95,19.52 U3.25
  Bottom 0.152: v77.98,2.16 76.83,1.01 39.12,1.01 30.86,9.27 v30.86,15.62
GPIO1  (1 unrouted)
GPIO2  (1 unrouted)
GPIO3  (1 unrouted)
GPIO4  (1 unrouted)
GPIO5  (1 unrouted)
GPIO6  (2 unrouted)
GPIO7  (2 unrouted)
GPIO8  (2 unrouted)
GPIO9  (2 unrouted)
GPIO10  (1 unrouted)
GPIO11  (1 unrouted)
GPIO12  (1 unrouted)
GPIO13  (1 unrouted)
GPIO14  (1 unrouted)
GPIO15  (1 unrouted)
GPIO16  (1 unrouted)
GPIO17  (1 unrouted)
GPIO18
  Top 0.152: U4.M19 70.75,34.81 78.88,34.81 84.96,28.73 R26.1
GPIO19  (2 unrouted)
  Top 0.152: R27.1 84.96,31.5 81.14,35.31 U4.M22
GPIO20  (1 unrouted)
  Top 0.152: R28.2 84.84,34.04 84.84,34.93 83.45,36.31 U4.L22
GPIO21  (1 unrouted)
  Top 0.152: J6.2 97.11,40.34 94.56,37.79 71.05,37.79 70.78,37.53 70.78,37 70.24,36.46 U4.L19
GPIO22  (1 unrouted)
  Top 0.152: J6.1 97.4,38.34 95.89,36.83 71.63,36.83 71.24,36.44 U4.L20
GPIO23  (1 unrouted)
  Top 0.152: J6.3 97.02,42.34 94.47,39.79 74.83,39.79 73.89,38.85 73,38.85 72.47,38.31 U4.J21
N$1
  Top 0.254: R2.1 D2.+
N$2
  Top 0.152: R17.1 56.86,2.59 RESET.4
N$3
  Top 0.152: R19.1 71.47,2.34 RESET_FPGA.4
N$4  (1 unrouted)
N$5  (1 unrouted)
N$6  (1 unrouted)
N$7
  Top 0.254: R1.1 4.63,21.59 4.37,21.84 D1.+
N$8  (1 unrouted)
N$9  (1 unrouted)
N$10  (1 unrouted)
N$11  (1 unrouted)
N$12
  Top 0.254: R10.2 Q3.1
N$13  (via drill 0.3)
  Top 0.254: Q2.1 17.4,16.38 v16.51,16.38 | v22.48,15.49 22.5,15.52 R9.2
  Bottom 0.254: v16.51,16.38 16.58,16.46 21.52,16.46 v22.48,15.49
N$14
  Top 0.254: IC1.4 7.75,47.72 7.75,46.95 9.2,45.49 R5.1
N$15  (1 unrouted)
N$16  (1 unrouted)
N$17
  Top 0.254: R5.2 10.01,42.66 C6.1
N$18  (1 unrouted)
N$19  (1 unrouted)
N$20
  Top 0.254: IC1.13 7.6,56.29 C9.1
N$21  (1 unrouted)
N$22
  Top 0.254: R3.1 4.63,25.65 4.37,25.4 D3.+
N$23  (1 unrouted)
N$24  (1 unrouted)
N$25
  Top 0.254: D4.- R16.2
N$26
  Top 0.254: U1.7 10.84,10.46 8.78,8.4 USB1.2
N$27  (via drill 0.3)
  Top 0.254: USB1.3 9.14,7.75 v11.02,9.63 | v12.12,11.15 13.86,11.15 U1.6
  Bottom 0.254: v11.02,9.63 12.12,10.72 v12.12,11.15
N$28
  Top 0.254: U1.9 12.05,9.16 9.75,6.86 C1.2 8.43,6.86 8,6.43 8,2.41 Y1.2
N$29
  Top 0.254: Y1.1 12.57,2.41 12.57,6.59 12.3,6.86 C2.2 11.43,7.75 12.19,8.51 U1.10
N$30
  Top 0.254: U1.3 17.45,13.06 18.9,11.61 18.9,7.92 20.09,6.73 R8.2
N$31
  Top 0.152: D6.1 93.83,32.91 92.84,33.91 91.65,33.91 Q6.3
N$32
  Top 0.152: Q5.1 86.55,30.79 R27.2
N$33
  Top 0.254: R7.2 24.58,4.7 26.19,6.3 U3.35
N$34
  Top 0.254: IC1.1 4.11,47.86 C8.1
N$35
  Top 0.254: IC1.8 IC1.9 10.24,53.78 L2.2
N$36  (1 unrouted)
N$37
  Top 0.254: IC1.14 6.93,53.76 6.93,54.72 5.71,55.93 R6.2 5.67,56.56 C10.1
N$38
  Top 0.254: IC2.4 28.55,48.45 28.55,47.48 30.43,45.59 R13.1
N$39
  Top 0.254: C19.1 R13.2
N$40
  Top 0.254: IC2.13 28.53,56.48 C20.1
N$41
  Top 0.254: IC2.1 24.79,48.47 C14.1
N$42
  Top 0.254: IC2.8 IC2.9 31.25,54.23 36.83,54.23 36.96,54.1 36.76,53.9 L3.2
N$43
  Top 0.254: C15.1 24.94,56.77 R15.2 26.8,56.77 27.88,55.69 IC2.14
N$44
  Top 0.152: D6.2 94.36,31.11 93.09,29.84 Q5.3
N$45
  Top 0.152: D6.3 95.48,29.21 94.23,29.21 93.47,28.45 93.47,26.42 92.96,25.91 Q4.3
N$46  (via drill 3.07)
  other vias: 4.65,62.51
N$47
  Top 0.152: Q6.1 88.45,34.73 87.63,33.91 R28.1
N$49
  Top 0.152: Q4.1 88.08,26.86 87.88,27.05 87.88,27.69 87.5,28.07 R26.2
N$57
  Top 0.254: R31.2 97.54,30.23 98.42,31.11 D6.5
N$60  (via drill 3.07)
  other vias: 16.33,3.51
N$61  (1 unrouted)
N$62  (via drill 3.07)
  other vias: 90.88,19.48
N$63  (via drill 3.07)
  other vias: 99.82,51.82
P_RESET  (1 unrouted)
PG_CORE  (via drill 0.3)
  Top 0.254: IC1.3 6.95,45.86 6.2,45.11 6.2,44.2 R4.2 6.25,41.89 v9.78,38.35 | IC2.12 29.18,55.6 v29.21,55.63 | U3.36 26.97,5.03 v26.67,5.33
  Bottom 0.254: v29.21,55.63 27.59,55.63 13.97,44.32 13.08,43.43 13.08,40.89 10.54,38.35 v9.78,38.35 25.02,23.11 25.02,16.23 26.67,14.59 v26.67,5.33
PG_IO  (via drill 0.3)
  Top 0.254: IC2.3 27.88,45.27 R14.2 27.94,41.78 v27.43,41.28 | v30.35,18.67 31.88,17.14 31.88,5.33 30.31,3.76 U3.37
  Bottom 0.254: v27.43,41.28 27.43,21.59 v30.35,18.67
PROG_CLK  (1 unrouted)
RESET  (via drill 0.3)
  Top 0.152: RESET.3 50.1,2.45 49.15,3.4 C23.2 47.88,3.91 46.72,5.07 v46.47,5.07 46.44,5.03 U3.3
  Top 0.254: Q3.3 24.77,19.56 v26.42,17.91 | v38.73,17.65 38.73,17.05 41.4,14.38 v41.4,6.48
  Bottom 0.254: v38.73,17.65 38.48,17.91 v26.42,17.91 | v41.4,6.48 45.06,6.48 v46.47,5.07
RESET_FPGA  (via drill 0.3)  (1 unrouted)
  Top 0.152: RESET_FPGA.3 63.59,2.07 63.12,2.54 C24.2 v60.83,2.54 | U3.7 44.08,10.11 43.74,9.77 v43.74,4.8
  Bottom 0.152: v60.83,2.54 58.36,2.54 57.19,1.37 47.17,1.37 v43.74,4.8
RTS  (via drill 0.3)  (1 unrouted)
  Top 0.254: U1.16 21.21,11.81 22.71,11.81 22.96,12.07 v22.96,12.09 | v21.01,15.52 21.01,16.48 R9.1 21.09,18.79
  Bottom 0.254: v22.96,12.09 22.96,13.56 v21.01,15.52
RXD0
  Top 0.254: R8.1 24.96,6.73 25.81,7.57 U3.34
SC_HEAD  (1 unrouted)
SD_CLK_IO14  (via drill 0.3)
  Top 0.152: D5.4 83.53,7.32 84.54,7.32 v84.78,7.08 84.94,6.93 86.74,6.93 J5.5 | v76.58,5.84 R20.1 76.5,3.81 68.78,11.53 v68.58,11.53 | U3.13 45.89,17.73 v45.97,17.65
  Bottom 0.152: v76.58,5.84 83.54,5.84 v84.78,7.08 | v45.97,17.65 46.35,17.27 46.35,14.3 49,11.66 68.45,11.66 v68.58,11.53
SD_CMD_IO15  (via drill 0.3)
  Top 0.152: J5.3 85.71,9.26 v85.47,9.02 | v85.47,7.5 85.2,7.77 D5.5 | v36.58,15.62 35.94,16.26 35.24,16.26 31.99,19.5 U3.23 | R24.1 v75.95,8.89
  Bottom 0.152: v85.47,7.5 v85.47,9.02 85.34,8.89 v75.95,8.89 45.59,8.89 38.86,15.62 v36.58,15.62
SD_CS_IO13  (via drill 0.3)
  Top 0.152: J5.2 85.96,10.36 | 85.96,10.36 85.98,10.38 84.67,10.38 v84.33,10.03 | 85.96,10.36 84.17,8.57 D5.7 | v82.17,10.03 81.66,9.53 R23.1 | U3.16 40.88,15.76 v41.02,15.62
  Bottom 0.152: v84.33,10.03 v82.17,10.03 46.61,10.03 v41.02,15.62
SD_D0_IO2  (via drill 0.3)  (1 unrouted)
  Top 0.152: D5.2 83.98,6.57 85.7,4.85 J5.7 88.11,4.85 v88.14,4.83 | R22.1 80.46,3.88 R18.2 | 80.39,4.06 80.46,3.99 81.84,3.99 v81.92,4.06 | v35.31,15.62 34.63,15.62 30.72,19.53 U3.24
  Bottom 0.152: v88.14,4.83 81.92,4.83 | 81.92,4.83 v81.92,4.06 | v35.31,15.62 35.94,14.99 37.47,14.99 47.62,4.83 81.92,4.83
SD_D1_IO4  (via drill 0.3)
  Top 0.152: D5.1 83.82,6.17 86.24,3.75 J5.8 83.37,3.75 R21.1 82.42,3.81 v81.92,3.3 | v29.97,15.62 29.97,16.57 28.81,17.73 U3.26
  Bottom 0.152: v81.92,3.3 81.92,2.52 80.03,0.63 38.86,0.63 29.97,9.53 v29.97,15.62
SD_D2_IO12  (via drill 0.3)  (1 unrouted)
  Top 0.152: 86.56,11.15 J5.1 83.54,11.46 83.48,11.4 | D5.8 83.48,11.4 | v80.01,12.07 80.39,11.68 80.39,11.48 | R25.1 83.26,11.18 83.48,11.4 | U3.14 45.81,19 v46.06,18.76
  Bottom 0.152: v46.06,18.76 47.33,17.49 47.33,15.28 50.42,12.19 79.88,12.19 v80.01,12.07
STAT_LED1  (via drill 0.3)
  Top 0.254: U3.33 25.52,8.84 v25.43,8.94 | v10.69,20.29 9.4,21.59 R1.2
  Bottom 0.254: v25.43,8.94 25.09,8.94 18.59,15.45 16.59,15.45 11.74,20.29 v10.69,20.29
STAT_LED2  (via drill 0.3)
  Top 0.254: U3.31 24.96,11.38 v24.31,12.04 | v10.46,23.39 7.92,23.39 R2.2
  Bottom 0.254: v24.31,12.04 24.31,15.49 16.4,23.39 v10.46,23.39
STAT_LED3  (via drill 0.3)
  Top 0.254: U3.30 26.22,12.65 v25.58,12.01 | v10.44,25.65 R3.2
  Bottom 0.254: v25.58,12.01 25.58,14.81 14.73,25.65 v10.44,25.65
TEST_EN  (1 unrouted)
TXD0
  Top 0.254: U1.4 13.91,12.39 16.96,12.39 18.09,11.27 18.09,6.55 19.94,4.7 R7.1
VBUS
  Top 0.508: USB1.1 8.51,9.05 8.89,9.42 L1.1
VCC2  (1 unrouted)
  Top 0.254: R29.2 R30.2 99.99,27.22 D6.4 101.32,29.31 101.98,29.97 101.98,32.39 101.45,32.91 D6.6
VDD_CORE
  Top 0.254: IC2.2 27.23,47.68 R12.1 R11.2

## Text on the board
tPlace: FrogDemoBoard / Jan 27 2022